# Altium PCB SensorHub_V1_1.PcbDoc
Units mm, origin at the board's own origin, x right, y up, seen from the top; angles counter-clockwise.
Board outline 59.56 x 50.67 mm, 4 copper layers (Top Layer, Layer 1, Layer 2, Bottom Layer), stack 1.782 mm thick; 64 components, 55 nets, 263 pads, 30 vias.
Unrouted connection lines stored in the file: 89.
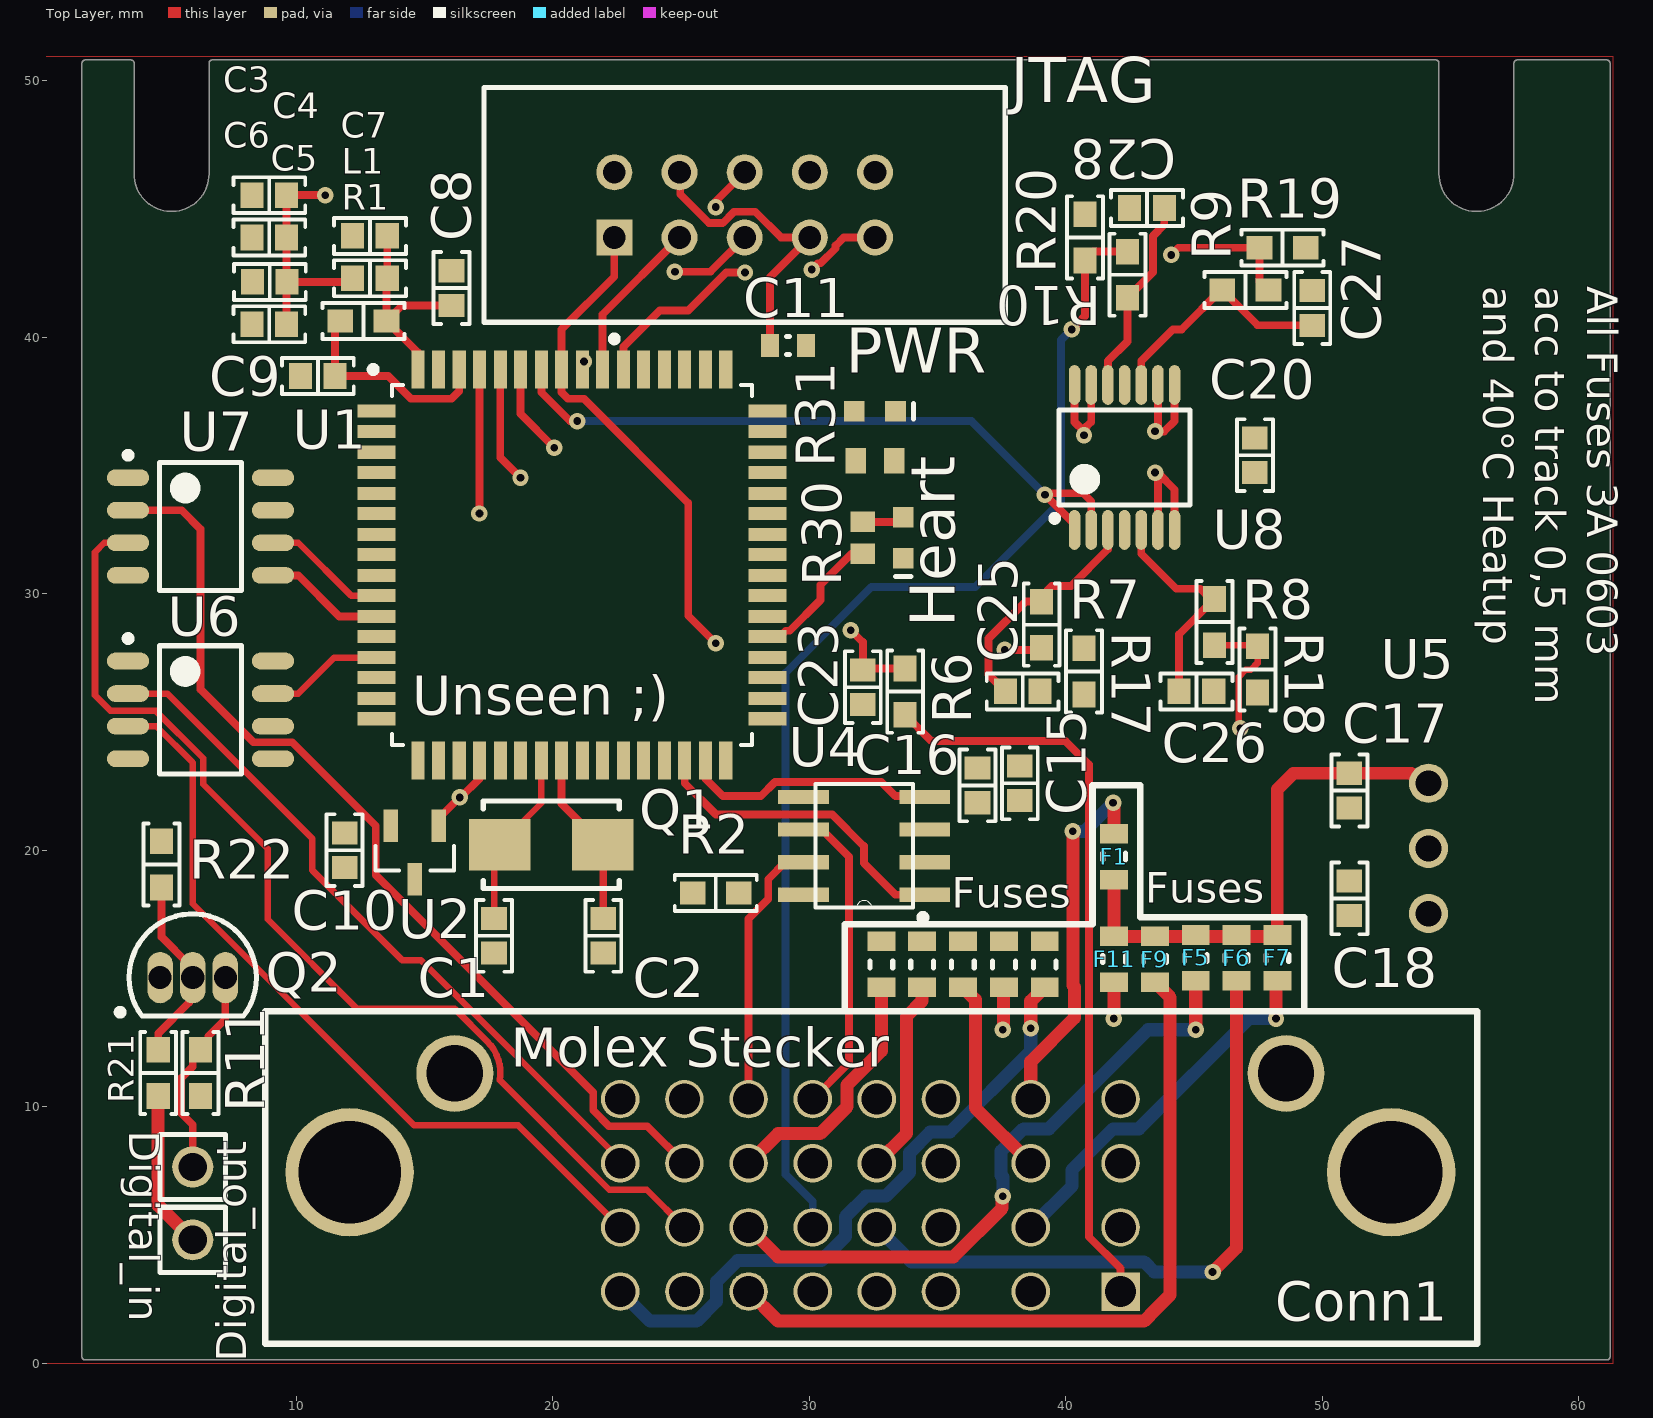
[diagram p0: Top Layer view]
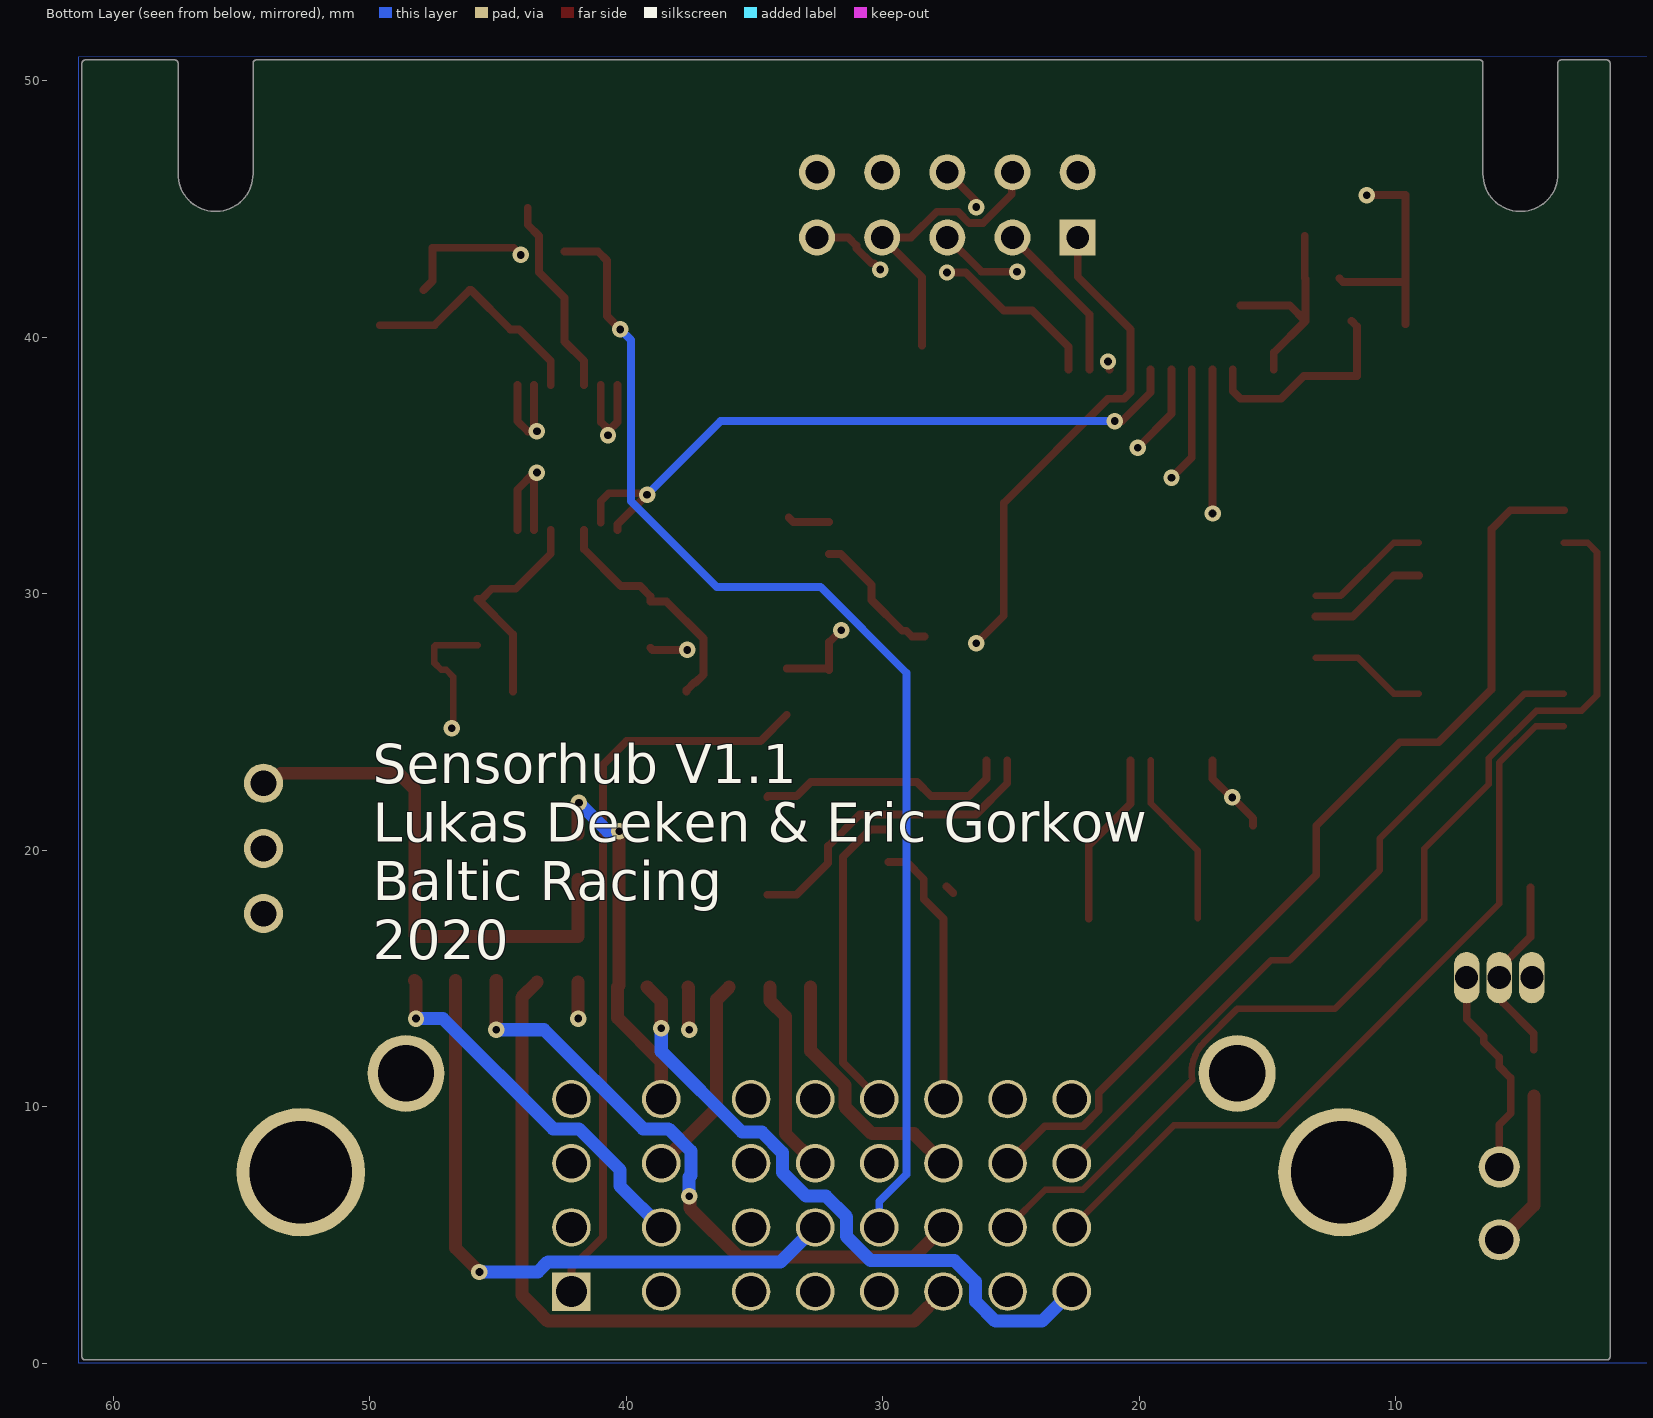
[diagram p1: Bottom Layer view, seen from below]
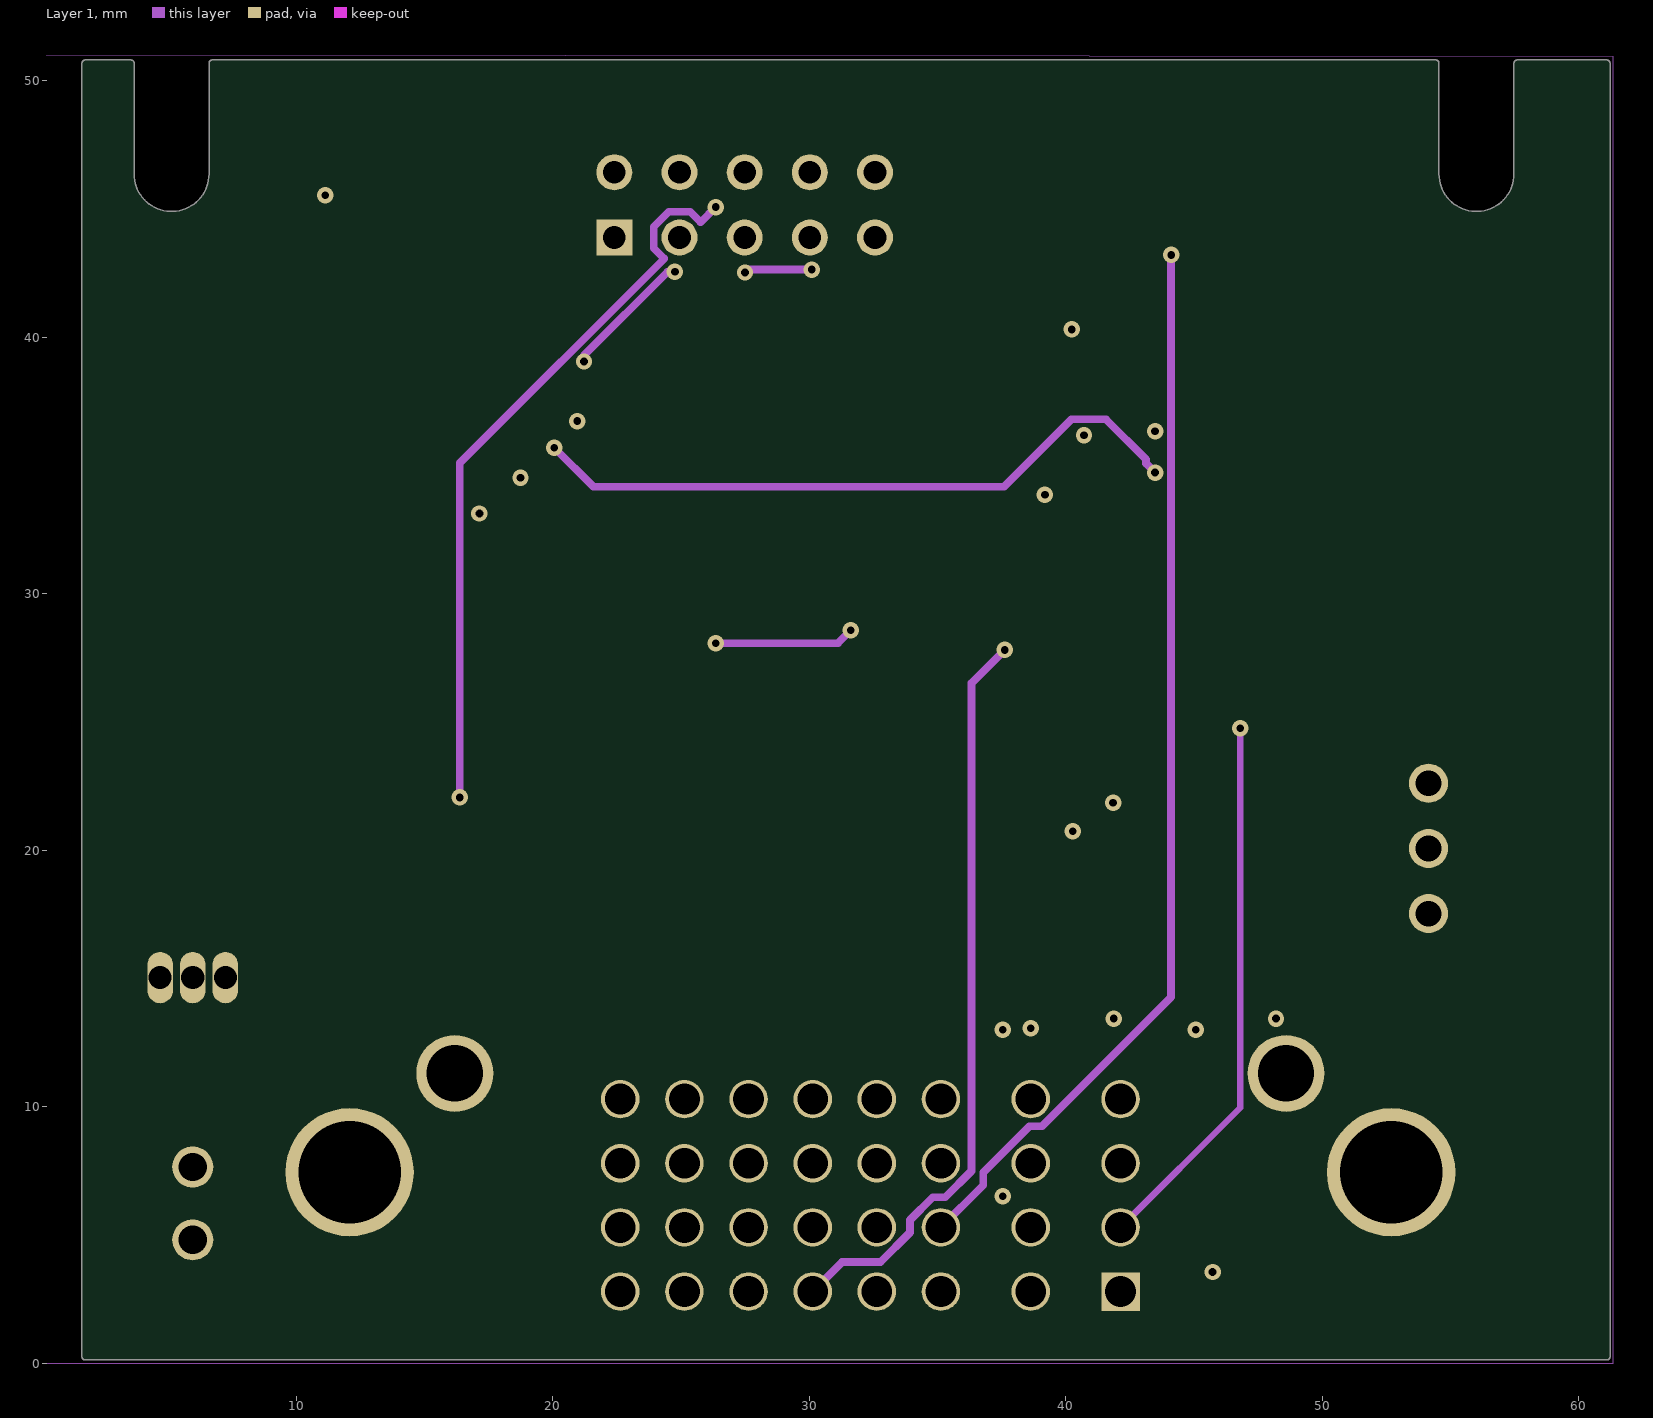
[diagram p2: Layer 1]
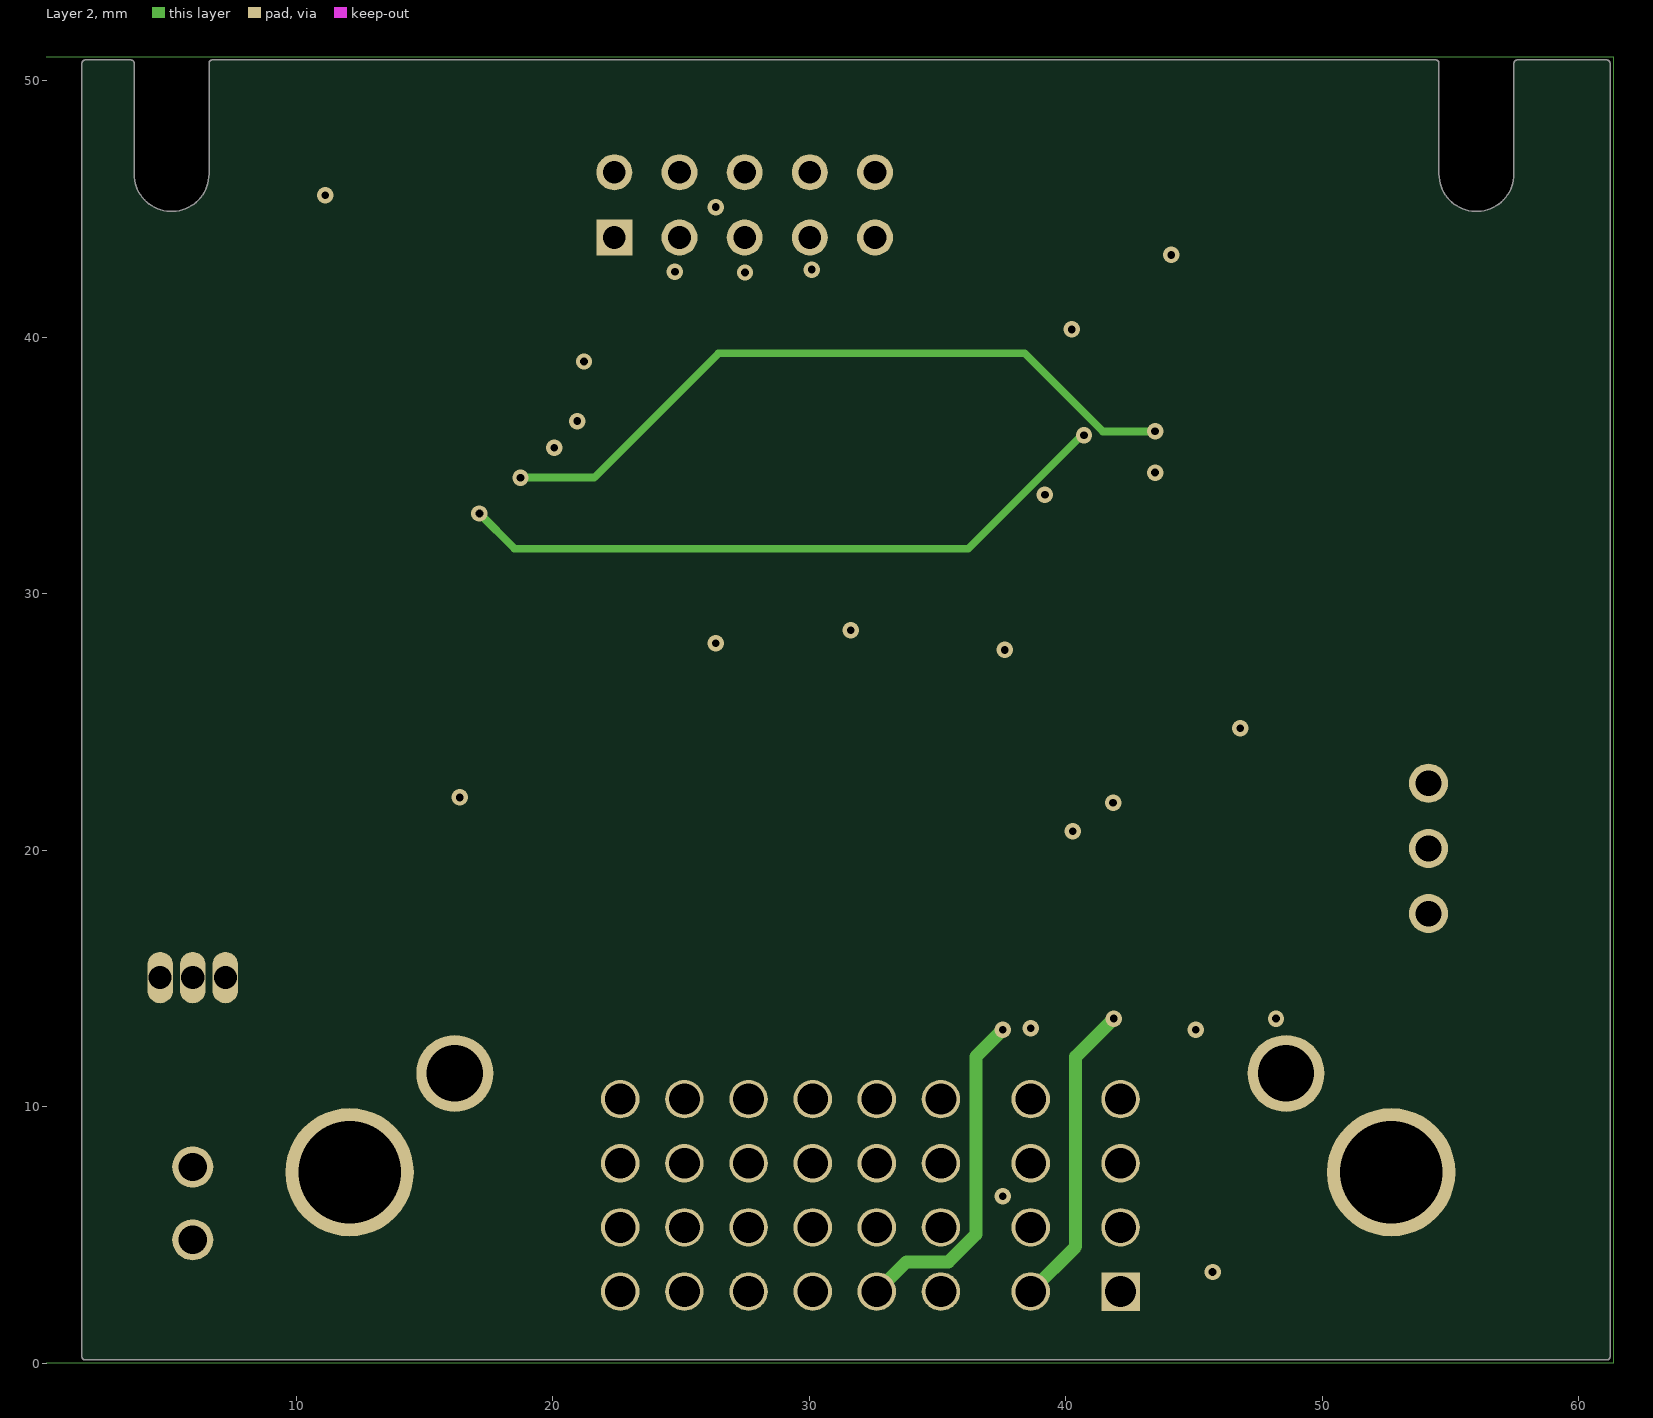
[diagram p3: Layer 2]
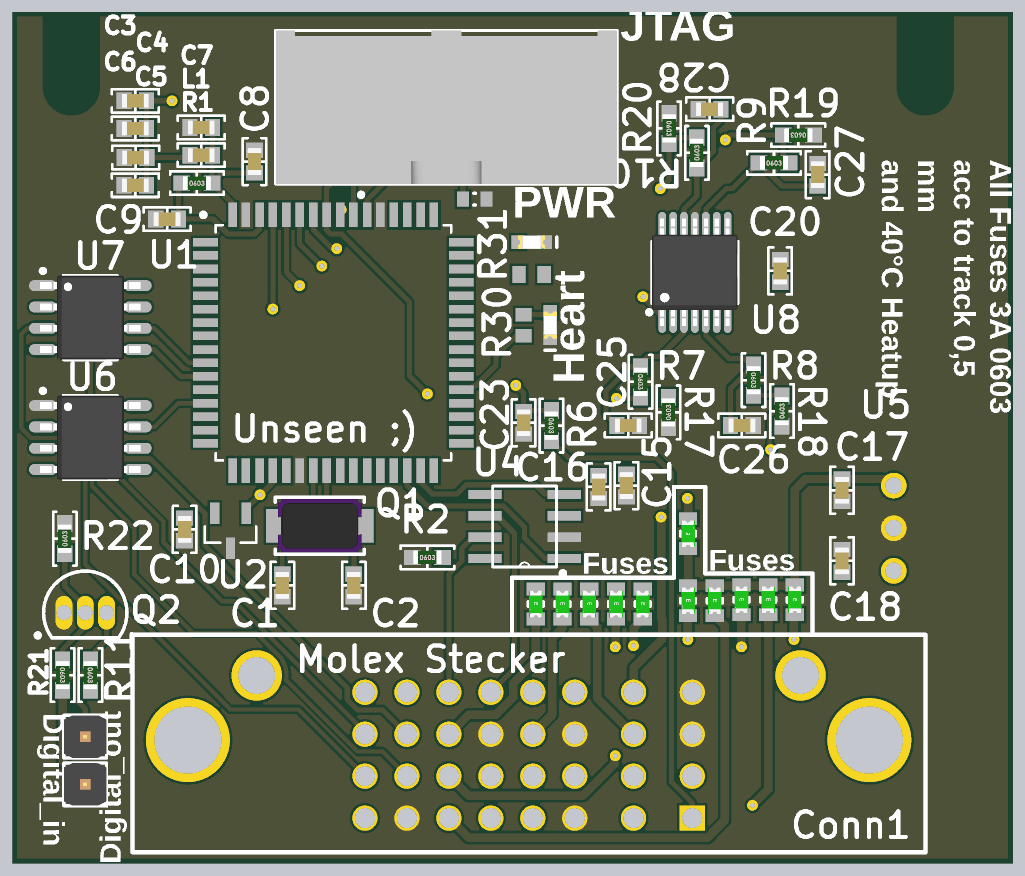
[diagram p4: 3D render of the assembled board from above, using the file's embedded part models]

## Layer stack, top to bottom
Top Solder: solder mask 0.015, Solder Resist, Dk 3.5
Top Layer: signal copper 0.035
Dielectric 2: prepreg 0.0711, PP-006, Dk 4.1
Layer 1: signal copper 0.035
Dielectric 1: dielectric 1.5, FR-4, Dk 4.8
Layer 2: signal copper 0.035
Dielectric 3: prepreg 0.0711, PP-006, Dk 4.1
Bottom Layer: signal copper 0.035
Bottom Solder: solder mask 0.015, Solder Resist, Dk 3.5

## Board outline
1.651,0.254 ccw(c1.778,0.254) 1.778,0.127 61.087,0.127 ccw(c61.087,0.254) 61.214,0.254 61.214,50.673 ccw(c61.087,50.673) 61.087,50.8 57.594,50.8 ccw(c57.594,50.673) 57.467,50.673 57.467,46.355 cw(c56.007,46.355) 54.547,46.355 ccw(c54.419,46.355) 54.546,46.371 ccw(c54.419,46.387) 54.547,46.387 54.547,50.673 ccw(c54.419,50.673) 54.419,50.8 6.731,50.8 ccw(c6.731,50.673) 6.604,50.673 6.604,46.355 cw(c5.143,46.355) 3.683,46.355 ccw(c3.556,46.355) 3.682,46.371 ccw(c3.556,46.387) 3.683,46.387 3.683,50.673 ccw(c3.556,50.673) 3.556,50.8 1.778,50.8 ccw(c1.778,50.673) 1.651,50.673

## Design rules (kind name [scope] priority, off if disabled: settings)
AcuteAngle [All] p1: minimum=4.50000000000000E+0001 checktracksonly=FALSE
BoardOutlineClearance [All] p1: gap=0.254 ignorepadtopadclearanceinfootprint=FALSE
Clearance [All] p1: gap=0.152 ignorepadtopadclearanceinfootprint=FALSE
ComponentClearance [All] p1: gap=0.1 collisioncheckmode=3 verticalgap=0.254 showdistances=FALSE
DiffPairsRouting [All] p1: maxlimit=0.254 minlimit=0.254 mostfreqgap=0.254 substack1={CA99ED5A-CE17-42EC-80FC-1AC0CC4A37E8} toplayer_{ca99ed5a-ce17-42ec-80fc-1ac0cc4a37e8}_minwidth=0.381 toplayer_{ca99ed5a-ce17-42ec-80fc-1ac0cc4a37e8}_maxwidth=0.381 toplayer_{ca99ed5a-ce17-42ec-80fc-1ac0cc4a37e8}_prefwidth=0.381 midlayer1_{ca99ed5a-ce17-42ec-80fc-1ac0cc4a37e8}_minwidth=0.381 midlayer1_{ca99ed5a-ce17-42ec-80fc-1ac0cc4a37e8}_maxwidth=0.381 midlayer1_{ca99ed5a-ce17-42ec-80fc-1ac0cc4a37e8}_prefwidth=0.381 midlayer2_{ca99ed5a-ce17-42ec-80fc-1ac0cc4a37e8}_minwidth=0.381 midlayer2_{ca99ed5a-ce17-42ec-80fc-1ac0cc4a37e8}_maxwidth=0.381 midlayer2_{ca99ed5a-ce17-42ec-80fc-1ac0cc4a37e8}_prefwidth=0.381 bottomlayer_{ca99ed5a-ce17-42ec-80fc-1ac0cc4a37e8}_minwidth=0.381 bottomlayer_{ca99ed5a-ce17-42ec-80fc-1ac0cc4a37e8}_maxwidth=0.381 bottomlayer_{ca99ed5a-ce17-42ec-80fc-1ac0cc4a37e8}_prefwidth=0.381 substack2={4E16F5BE-3B7B-4024-8785-4970FCCC0DF5} toplayer_{4e16f5be-3b7b-4024-8785-4970fccc0df5}_minwidth=0.381 toplayer_{4e16f5be-3b7b-4024-8785-4970fccc0df5}_maxwidth=0.381 toplayer_{4e16f5be-3b7b-4024-8785-4970fccc0df5}_prefwidth=0.381 midlayer1_{4e16f5be-3b7b-4024-8785-4970fccc0df5}_minwidth=0.381 midlayer1_{4e16f5be-3b7b-4024-8785-4970fccc0df5}_maxwidth=0.381 midlayer1_{4e16f5be-3b7b-4024-8785-4970fccc0df5}_prefwidth=0.381 midlayer2_{4e16f5be-3b7b-4024-8785-4970fccc0df5}_minwidth=0.381 midlayer2_{4e16f5be-3b7b-4024-8785-4970fccc0df5}_maxwidth=0.381 midlayer2_{4e16f5be-3b7b-4024-8785-4970fccc0df5}_prefwidth=0.381 bottomlayer_{4e16f5be-3b7b-4024-8785-4970fccc0df5}_minwidth=0.381 bottomlayer_{4e16f5be-3b7b-4024-8785-4970fccc0df5}_maxwidth=0.381 bottomlayer_{4e16f5be-3b7b-4024-8785-4970fccc0df5}_prefwidth=0.381 substack3={C653133C-51E7-40E1-B30A-AF168721F3D3} toplayer_{c653133c-51e7-40e1-b30a-af168721f3d3}_minwidth=0.381 toplayer_{c653133c-51e7-40e1-b30a-af168721f3d3}_maxwidth=0.381 toplayer_{c653133c-51e7-40e1-b30a-af168721f3d3}_prefwidth=0.381 midlayer1_{c653133c-51e7-40e1-b30a-af168721f3d3}_minwidth=0.381 midlayer1_{c653133c-51e7-40e1-b30a-af168721f3d3}_maxwidth=0.381 midlayer1_{c653133c-51e7-40e1-b30a-af168721f3d3}_prefwidth=0.381 midlayer2_{c653133c-51e7-40e1-b30a-af168721f3d3}_minwidth=0.381 midlayer2_{c653133c-51e7-40e1-b30a-af168721f3d3}_maxwidth=0.381 midlayer2_{c653133c-51e7-40e1-b30a-af168721f3d3}_prefwidth=0.381 bottomlayer_{c653133c-51e7-40e1-b30a-af168721f3d3}_minwidth=0.381 bottomlayer_{c653133c-51e7-40e1-b30a-af168721f3d3}_maxwidth=0.381 bottomlayer_{c653133c-51e7-40e1-b30a-af168721f3d3}_prefwidth=0.381 substack4={09100847-E393-40D3-803C-A9A256BA5B29} toplayer_{09100847-e393-40d3-803c-a9a256ba5b29}_minwidth=0.381 toplayer_{09100847-e393-40d3-803c-a9a256ba5b29}_maxwidth=0.381 toplayer_{09100847-e393-40d3-803c-a9a256ba5b29}_prefwidth=0.381 midlayer1_{09100847-e393-40d3-803c-a9a256ba5b29}_minwidth=0.381 midlayer1_{09100847-e393-40d3-803c-a9a256ba5b29}_maxwidth=0.381 midlayer1_{09100847-e393-40d3-803c-a9a256ba5b29}_prefwidth=0.381 midlayer2_{09100847-e393-40d3-803c-a9a256ba5b29}_minwidth=0.381 midlayer2_{09100847-e393-40d3-803c-a9a256ba5b29}_maxwidth=0.381 midlayer2_{09100847-e393-40d3-803c-a9a256ba5b29}_prefwidth=0.381 bottomlayer_{09100847-e393-40d3-803c-a9a256ba5b29}_minwidth=0.381 bottomlayer_{09100847-e393-40d3-803c-a9a256ba5b29}_maxwidth=0.381 bottomlayer_{09100847-e393-40d3-803c-a9a256ba5b29}_prefwidth=0.381 toplayer_minwidth=0.381 toplayer_maxwidth=0.381 toplayer_prefwidth=0.381 midlayer1_minwidth=0.381 midlayer1_maxwidth=0.381 midlayer1_prefwidth=0.381 midlayer2_minwidth=0.381 midlayer2_maxwidth=0.381 midlayer2_prefwidth=0.381 bottomlayer_minwidth=0.381 bottomlayer_maxwidth=0.381 bottomlayer_prefwidth=0.381 substack5={850A174A-CF50-4656-9076-8EF653247EDC} toplayer_{850a174a-cf50-4656-9076-8ef653247edc}_minwidth=0.381 toplayer_{850a174a-cf50-4656-9076-8ef653247edc}_maxwidth=0.381 toplayer_{850a174a-cf50-4656-9076-8ef653247edc}_prefwidth=0.381 midlayer1_{850a174a-cf50-4656-9076-8ef653247edc}_minwidth=0.381 midlayer1_{850a174a-cf50-4656-9076-8ef653247edc}_maxwidth=0.381 midlayer1_{850a174a-cf50-4656-9076-8ef653247edc}_prefwidth=0.381 midlayer2_{850a174a-cf50-4656-9076-8ef653247edc}_minwidth=0.381 midlayer2_{850a174a-cf50-4656-9076-8ef653247edc}_maxwidth=0.381 midlayer2_{850a174a-cf50-4656-9076-8ef653247edc}_prefwidth=0.381 bottomlayer_{850a174a-cf50-4656-9076-8ef653247edc}_minwidth=0.381 bottomlayer_{850a174a-cf50-4656-9076-8ef653247edc}_maxwidth=0.381 bottomlayer_{850a174a-cf50-4656-9076-8ef653247edc}_prefwidth=0.381 substack6={A10A70EA-7F77-4F58-96BE-70A77BD766A1} toplayer_{a10a70ea-7f77-4f58-96be-70a77bd766a1}_minwidth=0.381 toplayer_{a10a70ea-7f77-4f58-96be-70a77bd766a1}_maxwidth=0.381 toplayer_{a10a70ea-7f77-4f58-96be-70a77bd766a1}_prefwidth=0.381 midlayer1_{a10a70ea-7f77-4f58-96be-70a77bd766a1}_minwidth=0.381 midlayer1_{a10a70ea-7f77-4f58-96be-70a77bd766a1}_maxwidth=0.381 midlayer1_{a10a70ea-7f77-4f58-96be-70a77bd766a1}_prefwidth=0.381 midlayer2_{a10a70ea-7f77-4f58-96be-70a77bd766a1}_minwidth=0.381 midlayer2_{a10a70ea-7f77-4f58-96be-70a77bd766a1}_maxwidth=0.381 midlayer2_{a10a70ea-7f77-4f58-96be-70a77bd766a1}_prefwidth=0.381 bottomlayer_{a10a70ea-7f77-4f58-96be-70a77bd766a1}_minwidth=0.381 bottomlayer_{a10a70ea-7f77-4f58-96be-70a77bd766a1}_maxwidth=0.381 bottomlayer_{a10a70ea-7f77-4f58-96be-70a77bd766a1}_prefwidth=0.381 substack7={2CE0872D-BA40-4692-BFC0-68497A5CF797} toplayer_{2ce0872d-ba40-4692-bfc0-68497a5cf797}_minwidth=0.381 toplayer_{2ce0872d-ba40-4692-bfc0-68497a5cf797}_maxwidth=0.381 toplayer_{2ce0872d-ba40-4692-bfc0-68497a5cf797}_prefwidth=0.381 midlayer1_{2ce0872d-ba40-4692-bfc0-68497a5cf797}_minwidth=0.381 midlayer1_{2ce0872d-ba40-4692-bfc0-68497a5cf797}_maxwidth=0.381 midlayer1_{2ce0872d-ba40-4692-bfc0-68497a5cf797}_prefwidth=0.381 midlayer2_{2ce0872d-ba40-4692-bfc0-68497a5cf797}_minwidth=0.381 midlayer2_{2ce0872d-ba40-4692-bfc0-68497a5cf797}_maxwidth=0.381 midlayer2_{2ce0872d-ba40-4692-bfc0-68497a5cf797}_prefwidth=0.381 bottomlayer_{2ce0872d-ba40-4692-bfc0-68497a5cf797}_minwidth=0.381 bottomlayer_{2ce0872d-ba40-4692-bfc0-68497a5cf797}_maxwidth=0.381 bottomlayer_{2ce0872d-ba40-4692-bfc0-68497a5cf797}_prefwidth=0.381 substack8={B30524C4-33A9-40EE-B890-4E741981C730} toplayer_{b30524c4-33a9-40ee-b890-4e741981c730}_minwidth=0.381 toplayer_{b30524c4-33a9-40ee-b890-4e741981c730}_maxwidth=0.381 toplayer_{b30524c4-33a9-40ee-b890-4e741981c730}_prefwidth=0.381 midlayer1_{b30524c4-33a9-40ee-b890-4e741981c730}_minwidth=0.381 midlayer1_{b30524c4-33a9-40ee-b890-4e741981c730}_maxwidth=0.381 midlayer1_{b30524c4-33a9-40ee-b890-4e741981c730}_prefwidth=0.381 midlayer2_{b30524c4-33a9-40ee-b890-4e741981c730}_minwidth=0.381 midlayer2_{b30524c4-33a9-40ee-b890-4e741981c730}_maxwidth=0.381 midlayer2_{b30524c4-33a9-40ee-b890-4e741981c730}_prefwidth=0.381 bottomlayer_{b30524c4-33a9-40ee-b890-4e741981c730}_minwidth=0.381 bottomlayer_{b30524c4-33a9-40ee-b890-4e741981c730}_maxwidth=0.381 bottomlayer_{b30524c4-33a9-40ee-b890-4e741981c730}_prefwidth=0.381 maxuncoupledlength=12.7
FanoutControl Fanout_Small [All] p1 off: bgadir=Out bgaviamode=Centered fanoutstyle=Auto fanoutdirection=Alternating viagrid=0.025 // Protel DXP Scope 1 Expression Was: (CompPinCount < 5)   Fanout_Small (Default Rule)
FanoutControl Fanout_Default [All] p2: bgadir=Out bgaviamode=Centered fanoutstyle=Auto fanoutdirection=Alternating viagrid=0.025 // Fanout_Default (Default Rule)
FanoutControl Fanout_SOIC [All] p3 off: bgadir=Out bgaviamode=Centered fanoutstyle=Auto fanoutdirection=Alternating viagrid=0.025 // Protel DXP Scope 1 Expression Was: IsSOIC   Fanout_SOIC (Default Rule)
FanoutControl Fanout_BGA [All] p4 off: bgadir=Out bgaviamode=Centered fanoutstyle=Auto fanoutdirection=Alternating viagrid=0.025 // Protel DXP Scope 1 Expression Was: IsBGA   Fanout_BGA (Default Rule)
FanoutControl Fanout_LCC [All] p5 off: bgadir=Out bgaviamode=Centered fanoutstyle=Auto fanoutdirection=Alternating viagrid=0.025 // Protel DXP Scope 1 Expression Was: IsLCC   Fanout_LCC (Default Rule)
HoleSize [All] p1: absolutevalues=TRUE maxlimit=7 minlimit=0.2 maxpercent=80.000 minpercent=20.000
MinimumAnnularRing [All] p1: minimumring=0.17
PolygonConnect PolygonConnect_8 [All vs IsNamedPolygon('NONET_L04_P004')] p1: connectstyle=Direct reliefconductorwidth=0.254 reliefentries=4 polygonreliefangle="90 Angle" airgapwidth=0.254
PolygonConnect PolygonConnect_7 [All vs IsNamedPolygon('NONET_L03_P011')] p2: connectstyle=Direct reliefconductorwidth=0.254 reliefentries=4 polygonreliefangle="90 Angle" airgapwidth=0.254
PolygonConnect PolygonConnect_6 [All vs IsNamedPolygon('NONET_L02_P008')] p3: connectstyle=Direct reliefconductorwidth=0.254 reliefentries=4 polygonreliefangle="90 Angle" airgapwidth=0.254
PolygonConnect PolygonConnect_5 [All vs IsNamedPolygon('NONET_L01_P009')] p4: connectstyle=Direct reliefconductorwidth=0.254 reliefentries=4 polygonreliefangle="90 Angle" airgapwidth=0.254
PolygonConnect PolygonConnect_4 [All vs IsNamedPolygon('NONET_L04_P004')] p5: connectstyle=Direct reliefconductorwidth=0.254 reliefentries=4 polygonreliefangle="90 Angle" airgapwidth=0.254
PolygonConnect PolygonConnect_3 [All vs IsNamedPolygon('+5V_L03_P003')] p6: connectstyle=Direct reliefconductorwidth=0.254 reliefentries=4 polygonreliefangle="90 Angle" airgapwidth=0.254
PolygonConnect PolygonConnect_2 [All vs IsNamedPolygon('GND_L02_P002')] p7: connectstyle=Direct reliefconductorwidth=0.254 reliefentries=4 polygonreliefangle="90 Angle" airgapwidth=0.254
PolygonConnect PolygonConnect_1 [All vs IsNamedPolygon('GND_L01_P000')] p8: connectstyle=Direct reliefconductorwidth=0.254 reliefentries=4 polygonreliefangle="90 Angle" airgapwidth=0.254
PolygonConnect [All] p9: connectstyle=Relief reliefconductorwidth=0.254 reliefentries=4 polygonreliefangle="90 Angle" airgapwidth=0.254
RoutingVias [All] p1: holewidth=0.3 width=0.64 viastyle="Through Hole" minholewidth=0.3 minwidth=0.61 maxholewidth=0.711 maxwidth=1.27
SMDEntry [All] p1 off: side=TRUE corner=TRUE anyangle=FALSE // Protel DXP Scope 1 Expression Was: not IsRoundPad
SMDToCorner [All] p1: distance=60000
SilkToSolderMaskClearance [All] p1 off: minsilkscreentomaskgap=0.254 clearancetoexposedcopper=TRUE // Protel DXP Scope 1 Expression Was: IsPad
SolderMaskExpansion [All] p1: expansion=0 istentingtop=FALSE
Width [All] p1: maxlimit=1.219 minlimit=0.152 preferedwidth=0.305 substack1={CA99ED5A-CE17-42EC-80FC-1AC0CC4A37E8} substack2={4E16F5BE-3B7B-4024-8785-4970FCCC0DF5} substack3={C653133C-51E7-40E1-B30A-AF168721F3D3} substack4={09100847-E393-40D3-803C-A9A256BA5B29} substack5={850A174A-CF50-4656-9076-8EF653247EDC} substack6={A10A70EA-7F77-4F58-96BE-70A77BD766A1} substack7={2CE0872D-BA40-4692-BFC0-68497A5CF797} substack8={B30524C4-33A9-40EE-B890-4E741981C730}
21 further rules are at their usual default settings.

## Classes and differential pairs
component class main: C1 C2 C3 C4 C5 C6 C7 C8 C9 C10 C11 C15 C16 C17 C18 Conn1 Digital_in Digital_out Heart JTAG L1 PWR Q1 Q2 R1 R2 R11 R21 R22 R30 R31 U1 U2 U4 U5 U6 U7
component class "analog filterung": C20 C23 C25 C26 C28 R6 R7 R8 R9 R10 R17 R18 R19 R20 U8

## Components (designator, comment, footprint, x,y, rotation, side; value= is the part's Value field where it differs from the comment)
C1 "SMD Capacitor" "CAP 0603/1608" 17.712,16.661 r90 top
C2 "SMD Capacitor" "CAP 0603/1608" 21.972,16.661 r90 top
C3 "SMD Capacitor" "CAP 0603/1608" 8.953,45.531 r0 top
C4 "SMD Capacitor" "CAP 0603/1608" 8.953,43.88 r0 top
C5 "SMD Capacitor" "CAP 0603/1608" 8.953,40.499 r0 top
C6 "SMD Capacitor" "CAP 0603/1608" 8.971,42.149 r0 top
C7 "SMD Capacitor" "CAP 0603/1608" 12.877,43.942 r180 top
C8 "SMD Capacitor" "CAP 0603/1608" 16.052,41.91 r90 top
C9 "SMD Capacitor" "CAP 0603/1608" 10.845,38.481 r180 top
C10 "SMD Capacitor" "CAP 0603/1608" 11.889,19.997 r270 top
C11 "CAP 100nF 10V 0603(1608)" CAPC0603(1608)100_L 29.172,39.669 r0 top value=100nF
C15 "SMD Capacitor" "CAP 0603/1608" 38.208,22.606 r90 top
C16 "SMD Capacitor" "CAP 0603/1608" 36.557,22.523 r90 top
C17 "SMD Capacitor" "CAP 0603/1608" 51.054,22.323 r90 top
C18 "SMD Capacitor" "CAP 0603/1608" 51.054,18.121 r270 top
C20 "SMD Capacitor" "CAP 0603/1608" 47.371,35.393 r90 top
C23 "SMD Capacitor" "CAP 0603/1608" 32.089,26.35 r90 top
C25 "SMD Capacitor" "CAP 0603/1608" 38.319,26.187 r180 top
C26 "SMD Capacitor" "CAP 0603/1608" 45.093,26.187 r180 top
C27 "SMD Capacitor" "CAP 0603/1608" 49.605,41.132 r270 top
C28 "SMD Capacitor" "CAP 0603/1608" 43.164,45.029 r0 top
Conn1 "Molex 32Pin CMC Header 643341001" "Molex32Pin CMC Header 643341001" 22.634,2.794 r0 top
Digital_in "61300111121" 61300111121 5.969,4.81 r90 top
Digital_out "61300111121" 61300111121 5.969,7.65 r90 top
F1 "0438003.WRGT" FP-467-MFG 41.885,19.744 r90 top
F2 "0438003.WRGT" FP-467-MFG 32.808,15.549 r270 top
F3 "0438003.WRGT" FP-467-MFG 34.398,15.549 r270 top
F4 "0438003.WRGT" FP-467-MFG 35.989,15.549 r270 top
F5 "0438003.WRGT" FP-467-MFG 45.065,15.801 r270 top
F6 "0438003.WRGT" FP-467-MFG 46.655,15.801 r270 top
F7 "0438003.WRGT" FP-467-MFG 48.246,15.801 r270 top
F8 "0438003.WRGT" FP-467-MFG 39.179,15.549 r270 top
F9 "0438003.WRGT" FP-467-MFG 43.475,15.748 r270 top
F10 "0438003.WRGT" FP-467-MFG 37.589,15.549 r270 top
F11 "0438003.WRGT" FP-467-MFG 41.885,15.748 r270 top
Heart "150060BS75000" 0603_A 33.665,32.168 r90 top
JTAG "5103309-1" TECO-5103309-1_V 27.482,45.15 r180 top
L1 "SMD Capacitor" "CAP 0603/1608" 12.877,42.291 r180 top
PWR "150060GS75000" 0603_A 32.562,37.109 r180 top
Q1 "16M" "NDK NX5032GA" 19.944,20.211 r180 top
Q2 "2N3904" TO-92A 5.969,15.031 r270 top
R1 "SMD Resistor" "STACKPOLE CSR0603" 12.623,40.626 r0 top
R2 "SMD Resistor" "STACKPOLE CSR0603" 26.355,18.329 r0 top
R6 "SMD Resistor" "STACKPOLE CSR0603" 33.74,26.178 r270 top
R7 "SMD Resistor" "STACKPOLE CSR0603" 39.059,28.788 r270 top
R8 "SMD Resistor" "STACKPOLE CSR0603" 45.793,28.888 r270 top
R9 "SMD Resistor" "STACKPOLE CSR0603" 47.003,41.832 r0 top
R10 "SMD Resistor" "STACKPOLE CSR0603" 42.402,42.429 r90 top
R11 "SMD Resistor" "STACKPOLE CSR0603" 6.273,11.316 r270 top
R17 "SMD Resistor" "STACKPOLE CSR0603" 40.709,26.969 r90 top
R18 "SMD Resistor" "STACKPOLE CSR0603" 47.476,27.045 r90 top
R19 "SMD Resistor" "STACKPOLE CSR0603" 48.451,43.482 r180 top
R20 "SMD Resistor" "STACKPOLE CSR0603" 40.751,43.886 r270 top
R21 "SMD Resistor" "STACKPOLE CSR0603" 4.623,11.316 r270 top
R22 "SMD Resistor" "STACKPOLE CSR0603" 4.749,19.44 r90 top
R30 "CRCW0603130KFKEA" RESC1609X50X30NL10T20 32.089,32.168 r90 top
R31 "RC0603FR-07100RL" RESC1608X55X25ML10T15 32.562,35.179 r180 top
U1 "AT90CAN128-16AI" *QFP80P1600X1600X120-64N 20.751,31.115 r0 top
U2 "MCP130T-450I/TT" *SOT95P237X112-3N 14.623,19.913 r180 top
U4 "MCP2551-I/SN" *SOIC127P600X175-8N 32.142,20.169 r180 top
U5 "R-78E05-1.0" SIP3_RECOM 56.388,20.066 r270 top
U6 "MAX31855KASA+" SOIC8 6.273,25.468 r0 top value=Value
U7 "MAX31855KASA+" SOIC8 6.273,32.614 r0 top value=Value
U8 "ADA4084-4ARUZ" ANALOG_RU14 42.291,35.306 r90 top

## Footprints (in the part's own frame and the unit in brackets; to place one, negate y for a bottom-side part, rotate by r counter-clockwise, add the part's x,y. Pads: shape width x height; smd on the part's side, far side on the other; paste and mask are expansions set on the pad)
0603_A [mm] "Chip LED, 2-Leads, Body 1.6x0.8mm, IPC Medium Density"
  rect 0.8x0.8 smd: 1(-0.8,0) 2(0.8,0)
  silkscreen extent -1.5,-0.3 -1.5,0.3, body extent -0.8,-0.4 0.8,0.4, height 0.7
61300111121 [mm] "1pins, 1 row, straight, gold plating"
  round 1.6 hole 1.1: 1(0,0)
  silkscreen extent -1.27,-1.27 1.27,1.27, body extent -1.27,-1.27 1.27,1.27, height 8.57
*QFP80P1600X1600X120-64N [mil]
  rect 58x20 smd: 1(-300,236) 2(-300,205) 3(-300,173) 4(-300,142) 5(-300,110) 6(-300,79) 7(-300,47) 8(-300,16) 9(-300,-16) 10(-300,-47) 11(-300,-79) 12(-300,-110) 13(-300,-142) 14(-300,-173) 15(-300,-205) 16(-300,-236) 33(300,-236) 34(300,-205) 35(300,-173) 36(300,-142) 37(300,-110) 38(300,-79) 39(300,-47) 40(300,-16) 41(300,16) 42(300,47) 43(300,79) 44(300,110) 45(300,142) 46(300,173) 47(300,205) 48(300,236)
  rect 20x58 smd: 17(-236,-300) 18(-205,-300) 19(-173,-300) 20(-142,-300) 21(-110,-300) 22(-79,-300) 23(-47,-300) 24(-16,-300) 25(16,-300) 26(47,-300) 27(79,-300) 28(110,-300) 29(142,-300) 30(173,-300) 31(205,-300) 32(236,-300) 49(236,300) 50(205,300) 51(173,300) 52(142,300) 53(110,300) 54(79,300) 55(47,300) 56(16,300) 57(-16,300) 58(-47,300) 59(-79,300) 60(-110,300) 61(-142,300) 62(-173,300) 63(-205,300) 64(-236,300)
  silkscreen extent -310,-276 276,305, body extent -270,-270 270,270, height 30
*SOIC127P600X175-8N [mil]
  rect 78x22 smd: 1(-93,75) 2(-93,25) 3(-93,-25) 4(-93,-75) 5(93,-75) 6(93,-25) 7(93,25) 8(93,75)
  silkscreen extent -95,-95 75,115, body extent -75,-95 75,95, height 80
*SOT95P237X112-3N [mil]
  rect 22x50 smd: 1(-37,-41) 2(37,-41) 3(0,41)
  silkscreen extent -60,-10 60,28, body extent -60,-25 60,25, height 50
ANALOG_RU14 [mm] "Analog Devices 14-Lead Thin Shrink Small Outline Package [TSSOP]"
  oval 1.55x0.45 smd: 1(-2.825,1.95) 2(-2.825,1.3) 3(-2.825,0.65) 4(-2.825,0) 5(-2.825,-0.65) 6(-2.825,-1.3) 7(-2.825,-1.95) 8(2.825,-1.95) 9(2.825,-1.3) 10(2.825,-0.65) 11(2.825,0) 12(2.825,0.65) 13(2.825,1.3) 14(2.825,1.95)
  silkscreen extent -2.5,-2.55 1.85,2.85, body extent -3.2,-2.55 3.2,2.55, height 1.2
"CAP 0603/1608" [mm] "Chip Capacitor, 2-Leads, Body 1.60x0.80mm, IPC Medium Density"
  rect 0.9x1 smd: 1(-0.675,0) 2(0.675,0)
  silkscreen extent -1.4,-0.7 1.4,0.7, body extent -0.8,-0.41 0.8,0.41, height 0.82
CAPC0603(1608)100_L [mm] "Chip Capacitor, Body 1.6x0.8mm, Height 1.0mm, IPC High Density"
  rect 0.7x0.9 smd: 1(-0.7,0) 2(0.7,0)
  silkscreen extent -0.05,-0.35 0.05,0.35, body extent -0.87,-0.47 0.88,0.48, height 1
FP-467-MFG [mm]
  rect 0.762x1.09 smd paste+0 mask+0: 1(-0.891,0) 2(0.891,0)
  silkscreen extent -0.14,-0.44 0.14,0.44, body extent -1.37,-0.64 1.37,0.64, height 0.25
"Molex32Pin CMC Header 643341001" [mm]
  round 1.5 hole 1.2: 1(0,7.5) 2(2.5,7.5) 3(5,7.5) 4(7.5,7.5) 5(10,7.5) 6(12.5,7.5) 7(16,7.5) 8(19.5,7.5) 9(0,5) 10(2.5,5) 11(5,5) 12(7.5,5) 13(10,5) 14(12.5,5) 15(16,5) 16(19.5,5) 17(0,2.5) 18(2.5,2.5) 19(5,2.5) 20(7.5,2.5) 21(10,2.5) 22(12.5,2.5) 23(16,2.5) 24(19.5,2.5) 25(0,0) 26(2.5,0) 27(5,0) 28(7.5,0) 29(10,0) 30(12.5,0) 31(16,0)
  rect 1.5x1.5 hole 1.2: 32(19.5,0)
  round 5 hole 4: 219(-10.55,4.65) 219(30.05,4.65)
  round 3 hole 2.2: 220(-6.45,8.5) 220(25.95,8.5)
  silkscreen extent -13.84,-2.03 33.4,10.92
"NDK NX5032GA" [mm] "Crystal, 2-Leads, Body 5.00x3.20mm, IPC Medium Density"
  rect 2.4x2 smd: 1(-2,0) 2(2,0)
  silkscreen extent -2.65,-1.7 2.65,1.7, body extent -2.5,-1.6 2.5,1.6, height 1.2
RESC1608X55X25ML10T15 [mm] "Chip Resistor, 2-Leads, Body 1.60x0.80mm, IPC Low Density"
  rect 0.8x1 smd: 1(-0.75,0) 2(0.75,0)
  body extent -0.85,-0.45 0.85,0.45, height 0.55
RESC1609X50X30NL10T20 [mm] "Chip Resistor, 2-Leads, Body 1.55x0.85mm, IPC Medium Density"
  rect 0.8x0.95 smd: 1(-0.625,0) 2(0.625,0)
  body extent -0.82,-0.48 0.82,0.48, height 0.5
SIP3_RECOM [mm]
  round 1.524 hole 1: 1(-2.54,-2.25) 2(0,-2.25) 3(2.54,-2.25)
  body extent -5.75,-4.25 5.75,4.25, height 10.4
SOIC8 [mm] "SOIC, 8-Leads, Body 4,90x3,90mm, Pitch 1,27mm, IPC Low Density"
  oval 1.65x0.65 smd: 1(-2.825,1.905) 2(-2.825,0.635) 3(-2.825,-0.635) 4(-2.825,-1.905) 5(2.825,-1.905) 6(2.825,-0.635) 7(2.825,0.635) 8(2.825,1.905)
  silkscreen extent -2.95,-2.5 1.6,2.9, body extent -3,-2.5 3,2.5, height 1.75
"STACKPOLE CSR0603" [mm] "Chip Resistor, 2-Leads, Body 1.60x0.80mm, IPC Medium Density"
  rect 1x0.9 smd: 1(-0.9,0) 2(0.9,0)
  silkscreen extent -1.6,-0.7 1.6,0.7, body extent -0.85,-0.4 0.85,0.4, height 0.45
TECO-5103309-1_V [mm] "Male Header, 10-Leads, Body 20.32x9.144mm, Pitch 2.54mm"
  rect 1.4x1.4 hole 0.889: 1(5.08,1.27)
  round 1.4 hole 0.889: 2(5.08,-1.27) 3(2.54,1.27) 4(2.54,-1.27) 5(0,1.27) 6(0,-1.27) 7(-2.54,1.27) 8(-2.54,-1.27) 9(-5.08,1.27) 10(-5.08,-1.27)
  silkscreen extent -10.16,-4.57 10.16,5.35, body extent -10.16,-4.57 10.16,4.57, height 9.85
TO-92A [mm] "TO, Flat Index; 3 In-Line, Axial Leads; Body Dia. 4.5mm; Leads 0.51 x 0.48 mm (max)"
  oval 2x1 hole 0.9: 1(0,-1.27) 2(0,0) 3(0,1.27)
  silkscreen extent -2.48,-2.95 1.5,2.48, body extent -2.48,-2.5 1.5,2.5, height 6.86

## Part data
C1 C2 C3 C4 C5 C6 C7 C8 C9 C10 C15 C16 C17 C18 C20 C23 C25 C26 C27 C28 L1: "Capacitor with multiple Footprints"
C11: library part CMP-1035-02579-1, "CAP 100nF 10V ±5% 0603 (1608 Metric) Thickness 1mm SMD", Case-EIA=0603, Case-Metric=1608, Rated Voltage="10 V", Tolerance=Â±5%, Max Thickness="1 mm", Technology=SMT
Digital_in Digital_out: "WR-PHD 2.54 mm THT Pin Header, 1p", Rated Current="3 A", Withstanding Voltage="500 VAC", Working Voltage="250 VAC", ComponentLink1Description=Manufacturer, ComponentLink1URL=http://www.we-online.de, ComponentLink2Description=Datasheet, ComponentLink2URL=http://katalog.we-online.de/em/datasheet/6130xx11121.pdf, Part Number=61300111121, Pin Number=1, Pitch="2.54 mm", Published Date="Aug 2017", Publisher="Wurth Elektronik"
F1 F2 F3 F4 F5 F6 F7 F8 F9 F10 F11: library part CMP-08605-000028-1, "FUSE BOARD MOUNT 375MA 32VAC/VDC", Fuse Current=0.375A, Fuse Interrupt Ac Current=50A, Manufacturer=Littelfuse, Manufacturer Part Number=0467.375NR, Max Fuse Ac Voltage=32V, Package=467, Temperature="-55°C to +90°C", Temperature Range High=+90°C, Temperature Range Low=-55°C, Automotive=No, Category=Fuse, ComponentLink2Description=Datasheet, ComponentLink2URL=https://www.littelfuse.com/~/media/electronics/datasheets/fuses/littelfuse_fuse_467_datasheet.pdf.pdf, Device Class L1="Circuit Protection", Device Class L2=Fuses, Device Class L3=unset, Digikey Description="FUSE BOARD MOUNT 375MA 32VAC/VDC", Fuse Blow Speed=Fast, Fuse I2T=0.0035A2Sec, Fuse Interrupt Dc Current=50A, Height=0.432mm, Lead Free=Yes, Max Fuse Dc Voltage=32V, Mouser Description="Surface Mount Fuses 32V.375A VFA Slimline", Octopart=https://octopart.com/0467.375nr-littelfuse-565971, RoHS=TRUE, Voltage Rating=32V
Heart: library part CMP-1426-00003-1, "SMD mono-color Chip LED, WL-SMCW, Blue", Color=Blue, Manufacturer="Wuerth Elektronik", ComponentLink1Description="Manufacturer URL", ComponentLink1URL=http://www.we-online.com, ComponentLink2Description=Datasheet, ComponentLink2URL=http://katalog.we-online.com/led/datasheet/150060BS75000.pdf, PackageReference=0603_A, PartNumber=150060BS75000
JTAG: library part CMP-2000-07502-1, "Male Header, Pitch 2.54 mm, 2 x 5 Position, Height 9.855 mm, Tail Length 3.048 mm, -65 to 105 degC, RoHS, Tube", Colour=Black, Current Rating=1A, Flammability Rating=UL94V-0, Insulation Resistance=5GR, Manufacturer="TE Connectivity", Max Operating Temperature=105degC, Min Operating Temperature=-65degC, Package Description="Male Header, Pitch 2.54 mm, 2 x 5 Position, Height 9.855 mm, Tail Length 3.048 mm", Package Quantity=35, Board Standoff=Yes(With), Body Material=Thermoplastic, Connector System=Wire-to-Board, Connector Type=Header, Contact Gender=Male, Contact Material=CopperAlloy, Contact Mating Length=0.24inch, Contact Plating=Gold, Contact Shape=Square, Datasheet URL=http://www.te.com/commerce/DocumentDelivery/DDEController?Action=showdoc&DocId=Customer+Drawing%7F5103309%7FE1%7Fpdf%7FEnglish%7FENG_CD_5103309_E1.pdf%7F5103309-1, Datasheet Version="Rev. E1, 03/2011", Depth=9.14mm, ELV=Compliant, Gender=Male, Height=8.813mm, Housing Colour=Black, Housing Material=PBT, Lead Free=LeadFree, Length=0.8inch, Manufacturer URL=http://www.te.com/, Mating Alignment=Yes(With), Mating Connector Lock=No(Without), Mating Retention=No(Without), Max Current Rating=1A, Mount=ThroughHole, Mounting Technology=ThroughHole, Number of Contacts=10, Number of Positions=10, Number of Rows=2, Orientation=Straight, Package Reference=5103309-1, Packaging=Rail/Tube, Panel Mount Retention=No(Without), PCB Mount Alignment=No(Without), PCB Mount Retention=Without, PCB Mounting Orientation=Vertical, Pitch=2.54mm, REACH SVHC=NoSVHC, RoHSCompliant=True, Row Spacing=2.54mm, Shrouded=Yes(With), Shrouded End Dimension=3.81mm, Termination=ThroughHole, Termination Post Length=0.12inch
PWR: library part CMP-1426-00002-1, "SMD mono-color Chip LED, WL-SMCW, Green", Color=Green, Manufacturer="Wuerth Elektronik", ComponentLink1Description="Manufacturer URL", ComponentLink1URL=http://www.we-online.com, ComponentLink2Description=Datasheet, ComponentLink2URL=http://katalog.we-online.com/led/datasheet/150060GS75000.pdf, PackageReference=0603_A, PartNumber=150060GS75000
Q1: library part "16 MHz Quartz", "16 MHz Quartz"
Q2: "NPN General Purpose Amplifier", ComponentLink1Description="Manufacturer Link", ComponentLink1URL=http://www.fairchildsemi.com/, ComponentLink2Description=Datasheet, ComponentLink2URL=http://www.fairchildsemi.com/ds/2N%2F2N3904.pdf, DatasheetVersion=1997, LatestRevisionDate=15-Jan-2003, LatestRevisionNote="PCB Footprint 'BCY-W3/D4.7' replaced", PackageDescription="TO, Flat Index; 3 In-Line, Axial Leads; Body Dia. 4.5mm; Leads 0.51 x 0.48 mm (max)", PackageReference=TO-92A, PackageVersion=Sep-1998, Published=8-Jun-2000, Publisher="Altium Limited"
R1 R2 R6 R7 R8 R9 R10 R11 R17 R18 R19 R20 R21 R22: "Resistor with multiple footprints"
R30: library part CMP-2000-03887-1, Manufacturer="Vishay Dale", Part Number=CRCW0603130KFKEA
R31: library part CMP-2100-03663-1, "Chip Resistor, 100 Ohm, +/- 1%, 0.1 W, -55 to 155 degC, 0603 (1608 Metric), RoHS, Tape and Reel", Case Code (Imperial)=0603, Case Code (Metric)=1608, Manufacturer=Yageo, Max Operating Temperature=155degC, Min Operating Temperature=-55degC, Package Description="2-Pin Surface Mount Device, Body 1.6 x 0.8 mm", Power Rating=100mW, Resistance=100Ohm, Temperature Coefficient=100ppm/degreesC, Tolerance=1%, Voltage Rating=50V, Case/Package=0603, Composition=ThickFilm, Datasheet URL=http://www.yageo.com/NewPortal/yageodocoutput?fileName=/pdf/R-Chip/PYu-RC_Group_51_RoHS_L_5.pdf, Datasheet Version="Rev. 5, 10/2016", Depth=0.8mm, Height=0.45mm, Lead Free=LeadFree, Length=1.6mm, Manufacturer URL=http://www.yageo.com/, Military Standard=Not, Number of Pins=2, Package Reference=0603, Packaging=TapeandReel, REACH SVHC=Unknown, RoHSCompliant=true, Termination=SMD/SMT, Voltage Rating (DC)=50V, Width=0.8mm
U1: "Ic Mcu 8bit 128kb Flash 64tqfp", Package="TQFP-64 Microchip", Availability=Unavailable, MF=Microchip, MP=AT90CAN128-16AI, Price=None, SnapEDA_Link=https://www.snapeda.com/parts/AT90CAN128-16AI/Microchip/view-part/?ref=snap
U2: "System Supervisors - Power Supply Monitors with Reset Generators Open Drain Low", Package="SOT-23-3 Microchip", Availability=Unavailable, MF=Microchip, MP=MCP120T-450I/TT, Price=None, SnapEDA_Link=https://www.snapeda.com/parts/MCP120T-450I/TT/Microchip/view-part/?ref=snap
U4: "MCP2551 Series 5.5 V 1 Mb/s Surface Mount High-Speed CAN Transceiver - SOIC-8", Package="SOIC-8 Microchip", Availability=Unavailable, MF=Microchip, MP=MCP2551-I/SN, Price=None, SnapEDA_Link=https://www.snapeda.com/parts/MCP2551-I/SN/Microchip/view-part/?ref=snap
U5: "Nonisolated 5V Switchmode converter"
U6 U7: "No Description Available", Built_By=EMA_UL_Team, Copyright="Copyright (C) 2018 Accelerated Designs. All rights reserved", Manufacturer_Part_Number=MAX31855KASA+, RefDes=RefDes, Type=DEV, Vendor="Maxim Integrated Products"
U8: "30 V, Low Noise, Rail-to-Rail Input/Output, Low Power Operational Amplifiers"

## Via types
v1: diameter 0.64, hole 0.3, Top Layer to Bottom Layer, 30 vias

## Nets (pads, with @x,y where several pads share a name; then routed paths per layer and width w, separated by ;. In a path a pad name is that pad's centre, name@x,y a point inside that pad or via, vN(x,y) a via of type N, cw(c..) or ccw(c..) an arc to the next point about the centre after c; other vN are vias at no path point)
+5V: C3.2 C4.2 C5.2 C6.2 C10.1 C15.2 C16.2 C18.2 C20.1 F2.1 F3.1 F4.1 F8.1 F10.1 L1.2 R11.2 R31.1 U1.21 U1.52 U2.2 U4.3 U5.3 U6.4 U7.4 U8.4 | length 9.2
  Top Layer w0.305: C5.2 9.628,42.131 C6.2 ; v1(11.139,45.526) 11.135,45.531 C3.2 C4.2 9.628,42.168 C6.2 ; L1.2 12.06,42.149 C6.2
+12V: C17.2 F1.1 F5.1 F6.1 F7.1 F9.1 F11.1 U5.1 | length 20.6
  Top Layer w0.5: F1.1 F11.1 F9.1 45.065,16.639 46.655,16.639 48.193,16.639 F7.1 48.246,22.367 48.877,22.998 53.469,22.998 53.861,22.606 U5.1
GND: C1.1 C2.1 C3.1 C4.1 C5.1 C6.1 C7.2 C8.2 C9.2 C10.2 C11.2 C15.1 C16.1 C17.1 C18.1 C20.2 C23.1 C25.1 C26.1 C27.1 C28.1 Conn1.8 Conn1.12 Conn1.14 Conn1.16 Conn1.26 Conn1.30 Heart.1 JTAG.2 JTAG.10 PWR.1 Q2.1 R2.1 R17.1 R18.1 R19.1 R20.1 R22.2 U1.22 U1.53 U1.63 U2.3 U4.2 U5.2 U6.1 U7.1 U8.11
NetC1_2: C1.2 Q1.2 U1.23 | length 6.9
  Top Layer w0.254: C1.2 17.712,19.98 Q1.2 19.557,21.825 U1.23
NetC2_2: C2.2 Q1.1 U1.24 | length 6.8
  Top Layer w0.305: U1.24 20.345,21.81 Q1.1 21.972,20.183 C2.2
NetC9_1: C9.1 R1.1 U1.62 | length 8.4
  Top Layer w0.305: R1.1 11.52,40.423 C9.1 13.589,38.481 14.478,37.592 16.052,37.592 16.357,37.897 U1.62
NetC23_2: C23.2 JTAG.1 R6.1 U1.57 | length 28.4
  Top Layer w0.305: JTAG.1 22.402,42.355 20.345,40.297 U1.57 20.345,37.846 20.599,37.592 21.219,37.592 25.286,33.525 25.286,29.136 v1(26.355,28.067) ; v1(31.623,28.575) 32.089,28.109 C23.2 32.142,27.078 R6.1
  Layer 1 w0.305: v1(26.355,28.067) 31.115,28.067 v1(31.623,28.575)
NetC25_2: C25.2 R7.1 U8.3 | length 9.3
  Top Layer w0.305: C25.2 37.644,26.237 37.347,26.535 37.297,26.535 36.99,26.841 36.99,28.25 38.428,29.688 R7.1 39.059,29.899 39.455,30.295 40.209,30.295 41.641,31.728 U8.3
NetC26_2: C26.2 R8.1 U8.5 | length 8.7
  Top Layer w0.305: U8.5 42.941,31.549 44.303,30.187 45.235,30.187 45.634,29.788 R8.1 44.418,28.413 C26.2
NetC27_2: C27.2 R9.1 U8.10 | length 9.3
  Top Layer w0.305: U8.10 42.941,39.063 44.177,40.298 44.52,40.298 46.053,41.832 R9.1 47.478,40.457 C27.2
NetC28_2: C28.2 R10.1 U8.12 | length 7.8
  Top Layer w0.305: U8.12 41.641,39.063 42.402,39.824 R10.1 43.399,42.527 43.399,43.937 43.839,44.377 C28.2
NetConn1_1: Conn1.1 Conn1.2 Conn1.3 U4.7 | length 10.5
  Top Layer w0.305: Conn1.3 27.634,17.327 28.402,18.095 28.402,18.868 29.068,19.534 U4.7
NetConn1_4: Conn1.4 Conn1.5 Conn1.6 U4.6 | length 12.2
  Top Layer w0.305: U4.6 30.491,20.804 31.551,19.744 31.551,11.711 Conn1.4
NetConn1_7: Conn1.7 F1.2 | length 14.4
  Top Layer w0.508: Conn1.7 38.634,11.757 40.341,13.464 40.341,14.658 40.275,14.724 v1(40.275,20.73) ; v1(41.842,21.844) 41.842,21.808 41.885,21.766 F1.2
  Bottom Layer w0.508: v1(40.275,20.73) 40.728,20.73 v1(41.842,21.844)
NetConn1_9: Conn1.9 U6.2 | length 27.6
  Top Layer w0.254: U6.2 4.976,26.103 10.636,20.443 10.636,19.209 14.129,15.716 14.853,15.716 22.634,7.936 Conn1.9
NetConn1_10: Conn1.10 U7.2 | length 37.4
  Top Layer w0.305: U7.2 5.537,33.249 6.273,32.512 6.273,26.267 8.337,24.203 9.849,24.203 13.099,20.952 13.099,19.032 21.579,10.552 21.579,9.857 22.197,9.24 23.689,9.24 Conn1.10
NetConn1_11: Conn1.11 F2.2 | length 10
  Top Layer w0.508: Conn1.11 28.79,8.951 30.426,8.951 31.478,10.003 31.478,10.848 32.808,12.178 F2.2
NetConn1_13: Conn1.13 F3.2 | length 7.6
  Top Layer w0.508: Conn1.13 33.79,8.951 33.79,13.516 34.398,14.124 F3.2
NetConn1_15: Conn1.15 F4.2 | length 8
  Top Layer w0.508: F4.2 36.478,14.169 36.478,9.951 Conn1.15
NetConn1_17: Conn1.17 U6.3 | length 30.5
  Top Layer w0.254: U6.3 4.549,24.833 5.969,23.412 5.969,17.907 14.069,9.806 14.069,9.803 14.602,9.27 15.471,9.27 18.658,9.27 Conn1.17
NetConn1_18: Conn1.18 U7.3 | length 41.3
  Top Layer w0.254: U7.3 2.522,31.979 2.159,31.616 2.159,26.037 2.759,25.437 4.519,25.437 6.375,23.581 6.375,22.569 8.89,20.055 8.89,17.302 12.384,13.808 16.187,13.808 17.442,12.553 cw(c16.184,11.294) 17.944,11.029 22.208,6.765 23.663,6.765 Conn1.18
NetConn1_19: Conn1.19 F5.2 | length 24.9
  Top Layer w0.508: Conn1.19 28.79,4.138 35.613,4.138 37.519,6.044 37.519,6.484 v1(37.545,6.509) ; v1(45.065,12.999) F5.2
  Bottom Layer w0.508: v1(37.545,6.509) 37.545,7.248 37.478,7.315 37.478,8.273 38.342,9.138 39.342,9.138 43.203,12.999 v1(45.065,12.999)
NetConn1_20: Conn1.20 R10.2 R20.2 | length 47.1
  Top Layer w0.305: v1(40.228,40.296) 40.751,40.82 R20.2 41.094,43.329 R10.2
  Bottom Layer w0.305: Conn1.20 30.134,6.303 29.079,7.357 29.079,26.915 32.421,30.256 36.471,30.256 39.812,33.598 39.812,39.881 v1(40.228,40.296)
NetConn1_21: Conn1.21 F6.2 | length 25.5
  Top Layer w0.508: v1(45.72,3.556) 46.655,4.491 F6.2
  Bottom Layer w0.508: Conn1.21 33.978,3.951 43.052,3.951 43.447,3.556 v1(45.72,3.556)
NetConn1_22: Conn1.22 R9.2 R19.2 | length 47.3
  Top Layer w0.305: v1(44.106,43.2) 44.388,43.482 R19.2 47.551,42.183 R9.2
  Layer 1 w0.305: Conn1.22 36.78,6.94 36.78,7.432 38.587,9.24 39.071,9.24 44.106,14.274 v1(44.106,43.2)
NetConn1_23: Conn1.23 F7.2 | length 14.8
  Top Layer w0.508: v1(48.193,13.434) 48.193,14.857 F7.2
  Bottom Layer w0.508: Conn1.23 40.239,6.9 40.239,7.535 41.842,9.138 42.845,9.138 47.141,13.434 v1(48.193,13.434)
NetConn1_24: Conn1.24 R8.2 R18.2 | length 26.7
  Top Layer w0.254: R8.2 47.433,27.988 R18.2 47.476,27.293 47.21,27.027 47.013,27.027 46.747,26.761 46.747,24.799 v1(46.798,24.748)
  Layer 1 w0.254: Conn1.24 46.798,9.958 v1(46.798,24.748)
NetConn1_25: Conn1.25 F8.2 | length 24.9
  Top Layer w0.508: v1(38.634,13.061) 38.634,14.112 F8.2
  Bottom Layer w0.508: Conn1.25 23.79,1.638 25.613,1.638 26.384,2.409 26.384,3.18 27.202,3.998 30.473,3.998 31.407,4.932 31.407,5.703 32.214,6.509 32.984,6.509 33.913,7.438 33.913,8.209 34.716,9.012 35.487,9.012 38.634,12.159 v1(38.634,13.061)
NetConn1_27: Conn1.27 F9.2 | length 29.8
  Top Layer w0.508: Conn1.27 28.79,1.638 43.052,1.638 43.29,1.876 43.29,1.888 44.069,2.667 44.069,14.263 F9.2
NetConn1_28: Conn1.28 R7.2 R17.2 | length 30.7
  Top Layer w0.305: v1(37.615,27.803) 38.975,27.803 R7.2
  Layer 1 w0.305: Conn1.28 31.28,3.94 32.772,3.94 33.93,5.098 33.93,5.582 34.817,6.47 35.301,6.47 36.323,7.491 36.323,26.511 v1(37.615,27.803)
NetConn1_29: Conn1.29 F10.2 | length 14.9
  Top Layer w0.508: v1(37.545,12.999) 37.567,13.021 37.567,14.635 F10.2
  Layer 2 w0.508: Conn1.29 33.79,3.951 35.426,3.951 36.495,5.02 36.495,11.949 v1(37.545,12.999)
NetConn1_31: Conn1.31 F11.2 | length 13.4
  Top Layer w0.508: v1(41.873,13.434) 41.873,14.845 F11.2
  Layer 2 w0.508: Conn1.31 40.386,4.546 40.386,11.947 v1(41.873,13.434)
NetConn1_32: Conn1.32 R6.2 | length 29
  Top Layer w0.305: R6.2 34.76,24.257 39.984,24.257 40.9,23.341 40.9,4.931 42.134,3.697 Conn1.32
NetDigital_in_1: Digital_in.1 R21.2 | length 6.2
  Top Layer w0.508: R21.2 4.623,6.155 Digital_in.1
NetDigital_out_1: Digital_out.1 Q2.3 R11.1 | length 8.3
  Top Layer w0.305: Digital_out.1 5.969,9.296 5.518,9.747 5.518,11.113 5.969,11.564 5.969,11.912 6.571,12.514 6.571,12.742 7.239,13.41 Q2.3
NetHeart_2: Heart.2 R30.2 | length 1.6
  Top Layer w0.305: R30.2 33.49,32.793 Heart.2
NetJTAG_3: JTAG.3 U1.55 | length 6.4
  Top Layer w0.305: U1.55 21.945,40.883 JTAG.3
NetJTAG_5: JTAG.5 U1.56 | length 8.8
  Top Layer w0.305: U1.56 21.158,39.047 v1(21.219,39.047) ; v1(24.765,42.545) 26.147,42.545 JTAG.5
  Layer 1 w0.305: v1(21.219,39.047) 21.219,39.284 24.48,42.545 v1(24.765,42.545)
NetJTAG_6: JTAG.6 U1.20 U2.1 | length 33.8
  Top Layer w0.305: U2.1 15.563,21.239 v1(16.379,22.055) 16.415,22.055 17.144,22.785 U1.20 ; v1(26.355,45.066) 26.355,45.293 JTAG.6
  Layer 1 w0.305: v1(16.379,22.055) 16.379,35.091 24.345,43.057 23.937,43.464 23.937,44.297 24.526,44.885 25.358,44.885 25.766,44.478 v1(26.355,45.066)
NetJTAG_9: JTAG.9 U1.54 | length 12.5
  Top Layer w0.305: U1.54 22.758,39.624 24.171,41.038 25.286,41.038 26.764,42.515 v1(27.494,42.515) ; v1(30.093,42.629) 30.339,42.876 30.438,42.876 31.027,43.464 31.027,43.564 31.344,43.88 JTAG.9
  Layer 1 w0.305: v1(27.494,42.515) 27.494,42.533 27.482,42.545 27.566,42.629 v1(30.093,42.629)
NetPWR_2: PWR.2 R31.2
NetQ2_2: Q2.2 R21.1 R22.1 | length 7.3
  Top Layer w0.305: R21.1 4.623,12.852 5.836,14.065 5.836,15.532 4.749,16.619 R22.1
NetR2_2: R2.2 U4.8 | length 0.4
  Top Layer w0.305: R2.2 R2.2@27.513,18.587
NetR30_1: R30.1 U1.37 | length 5.4
  Top Layer w0.305: U1.37 28.854,28.321 29.082,28.55 29.234,28.55 30.437,29.753 30.437,30.34 31.641,31.543 R30.1
NetU1_10: U1.10 U6.6 U7.6 | length 4.9
  Top Layer w0.254: U7.6 10.082,31.979 12.139,29.921 U1.10
NetU1_11: U1.11 U6.5 U7.5 | length 4.7
  Top Layer w0.305: U7.5 10.082,30.709 11.682,29.108 U1.11
NetU1_13: U1.13 U6.7 U7.7 | length 4.6
  Top Layer w0.254: U6.7 10.082,26.103 11.487,27.508 U1.13
NetU1_30: U1.30 U4.1 | length 12.4
  Top Layer w0.305: U1.30 25.145,22.606 26.363,21.388 30.897,21.388 32.129,20.156 32.129,19.496 33.361,18.264 U4.1
NetU1_31: U1.31 U4.4 | length 10
  Top Layer w0.305: U1.31 25.958,22.785 26.638,22.105 28.11,22.105 28.663,22.658 32.808,22.658 33.361,22.105 34.473,22.105 U4.4
NetU1_58: U1.58 U8.1 U8.2 | length 26.8
  Top Layer w0.305: U1.58 19.557,37.846 20.68,36.724 v1(20.955,36.724) ; U8.1 40.341,32.704 v1(39.188,33.857) 39.24,33.909 40.679,33.909 40.991,33.597 U8.2@40.991,32.776
  Bottom Layer w0.305: v1(20.955,36.724) 36.321,36.724 v1(39.188,33.857)
NetU1_59: U1.59 U8.6 U8.7 | length 34.6
  Top Layer w0.305: U1.59 18.745,37.008 v1(20.066,35.687) ; v1(43.481,34.718) 43.706,34.493 43.591,34.379 U8.6 ; v1@43.572,34.718 44.241,34.049 U8.7
  Layer 1 w0.305: v1(20.066,35.687) 21.591,34.162 37.591,34.162 40.225,36.796 41.563,36.796 43.13,35.229 43.13,35.069 v1(43.481,34.718)
NetU1_60: U1.60 U8.8 U8.9 | length 36.8
  Top Layer w0.305: U1.60 17.957,35.306 v1(18.745,34.519) ; v1@43.545,36.386 v1(43.481,36.322) v1@43.591,36.322 ; U8.9 v1@43.591,36.322 ; U8.8 44.241,36.725 43.838,36.322 v1@43.591,36.322
  Layer 2 w0.305: v1(18.745,34.519) 21.615,34.519 26.466,39.37 38.395,39.37 41.443,36.322 v1(43.481,36.322)
NetU1_61: U1.61 U8.13 U8.14 | length 35.6
  Top Layer w0.305: v1(17.144,33.122) U1.61 ; U8.14 40.341,36.69 v1@40.709,36.322 ; v1(40.709,36.172) v1@40.709,36.322 ; U8.13 40.991,36.694 40.709,36.413 v1@40.709,36.322
  Layer 2 w0.305: v1(17.144,33.122) 18.516,31.75 36.197,31.75 40.619,36.172 v1(40.709,36.172)
VDD: C11.1 JTAG.4 JTAG.7 | length 11.8
  Top Layer w0.305: JTAG.4 24.969,46.393 24.969,45.568 26.096,44.441 26.622,44.441 27.066,44.885 27.898,44.885 28.903,43.88 JTAG.7 28.472,42.33 C11.1
VDDA: C7.1 C8.1 L1.1 R1.2 U1.64 | length 8.5
  Top Layer w0.305: C7.1 L1.1 13.523,42.262 R1.2 ; U1.64 14.757,39.392 R1.2 ; C8.1 14.132,41.235 R1.2
pads on no net: Conn1.219 Conn1.220 JTAG.8 U1.1 U1.2 U1.3 U1.4 U1.5 U1.6 U1.7 U1.8 U1.9 U1.12 U1.14 U1.15 U1.16 U1.17 U1.18 U1.19 U1.25 U1.26 U1.27 U1.28 U1.29 U1.32 U1.33 U1.34 U1.35 U1.36 U1.38 U1.39 U1.40 U1.41 U1.42 U1.43 U1.44 U1.45 U1.46 U1.47 U1.48 U1.49 U1.50 U1.51 U4.5 U6.8 U7.8

## Polygon pours and split planes (outlines as drawn)
GND on Top Layer "NONET_L01_P009" (solid, shelved, pour order 9): 0,0 61.341,0 61.341,50.927 0,50.927
GND on Layer 1 "NONET_L02_P008" (solid, shelved, pour order 8): 0,0 61.341,0 61.341,50.927 0.061,50.988
+5V on Layer 2 "NONET_L03_P011" (solid, shelved, pour order 11): 0,50.927 61.341,50.927 61.341,0 0,0
+5V on Bottom Layer "NONET_L04_P004" (solid, shelved, pour order 4): 0,0 61.341,0 61.341,50.927 0.024,50.951

## Silkscreen, mask and mechanical layers (free items; w line width, h text height)
Top Overlay:
  lines w0.254: 31.389,13.716 31.389,16.891 31.389,17.116 41.041,17.116 41.041,22.523 42.91,22.523 42.91,17.375 49.294,17.375 49.294,13.716
  text "All Fuses 3A 0603 / acc to track 0,5 mm / and 40°C Heatup" at 55.88,41.981 h2.03 r270
  text "Unseen ;)" at 14.531,25.274 h1.52
  text "Fuses" at 43.102,17.55 h2.03
  text "Fuses" at 35.56,17.36 h2.03
  text "Molex Stecker" at 18.366,11.548 h1.52
Bottom Overlay:
  text "Sensorhub V1.1 / Lukas Deeken & Eric Gorkow / Baltic Racing / 2020" at 49.874,15.753 h1.52
Board Outline:
  lines w0.254: 3.556,46.355 ccw(c5.143,46.355) 6.731,46.355 6.731,50.673 52.959,50.673 54.419,50.673 54.419,46.387 ; 3.556,46.387 3.556,47.458 3.556,49.601 3.556,50.673 2.54,50.673 1.778,50.673 1.778,0.254 61.087,0.254 61.087,50.673 58.547,50.673 57.594,50.673 57.594,46.355 cw(c56.007,46.355) 54.419,46.355